# EAGLE board Spectroscilloscope Revised_5 (EAGLE 9.6.2)
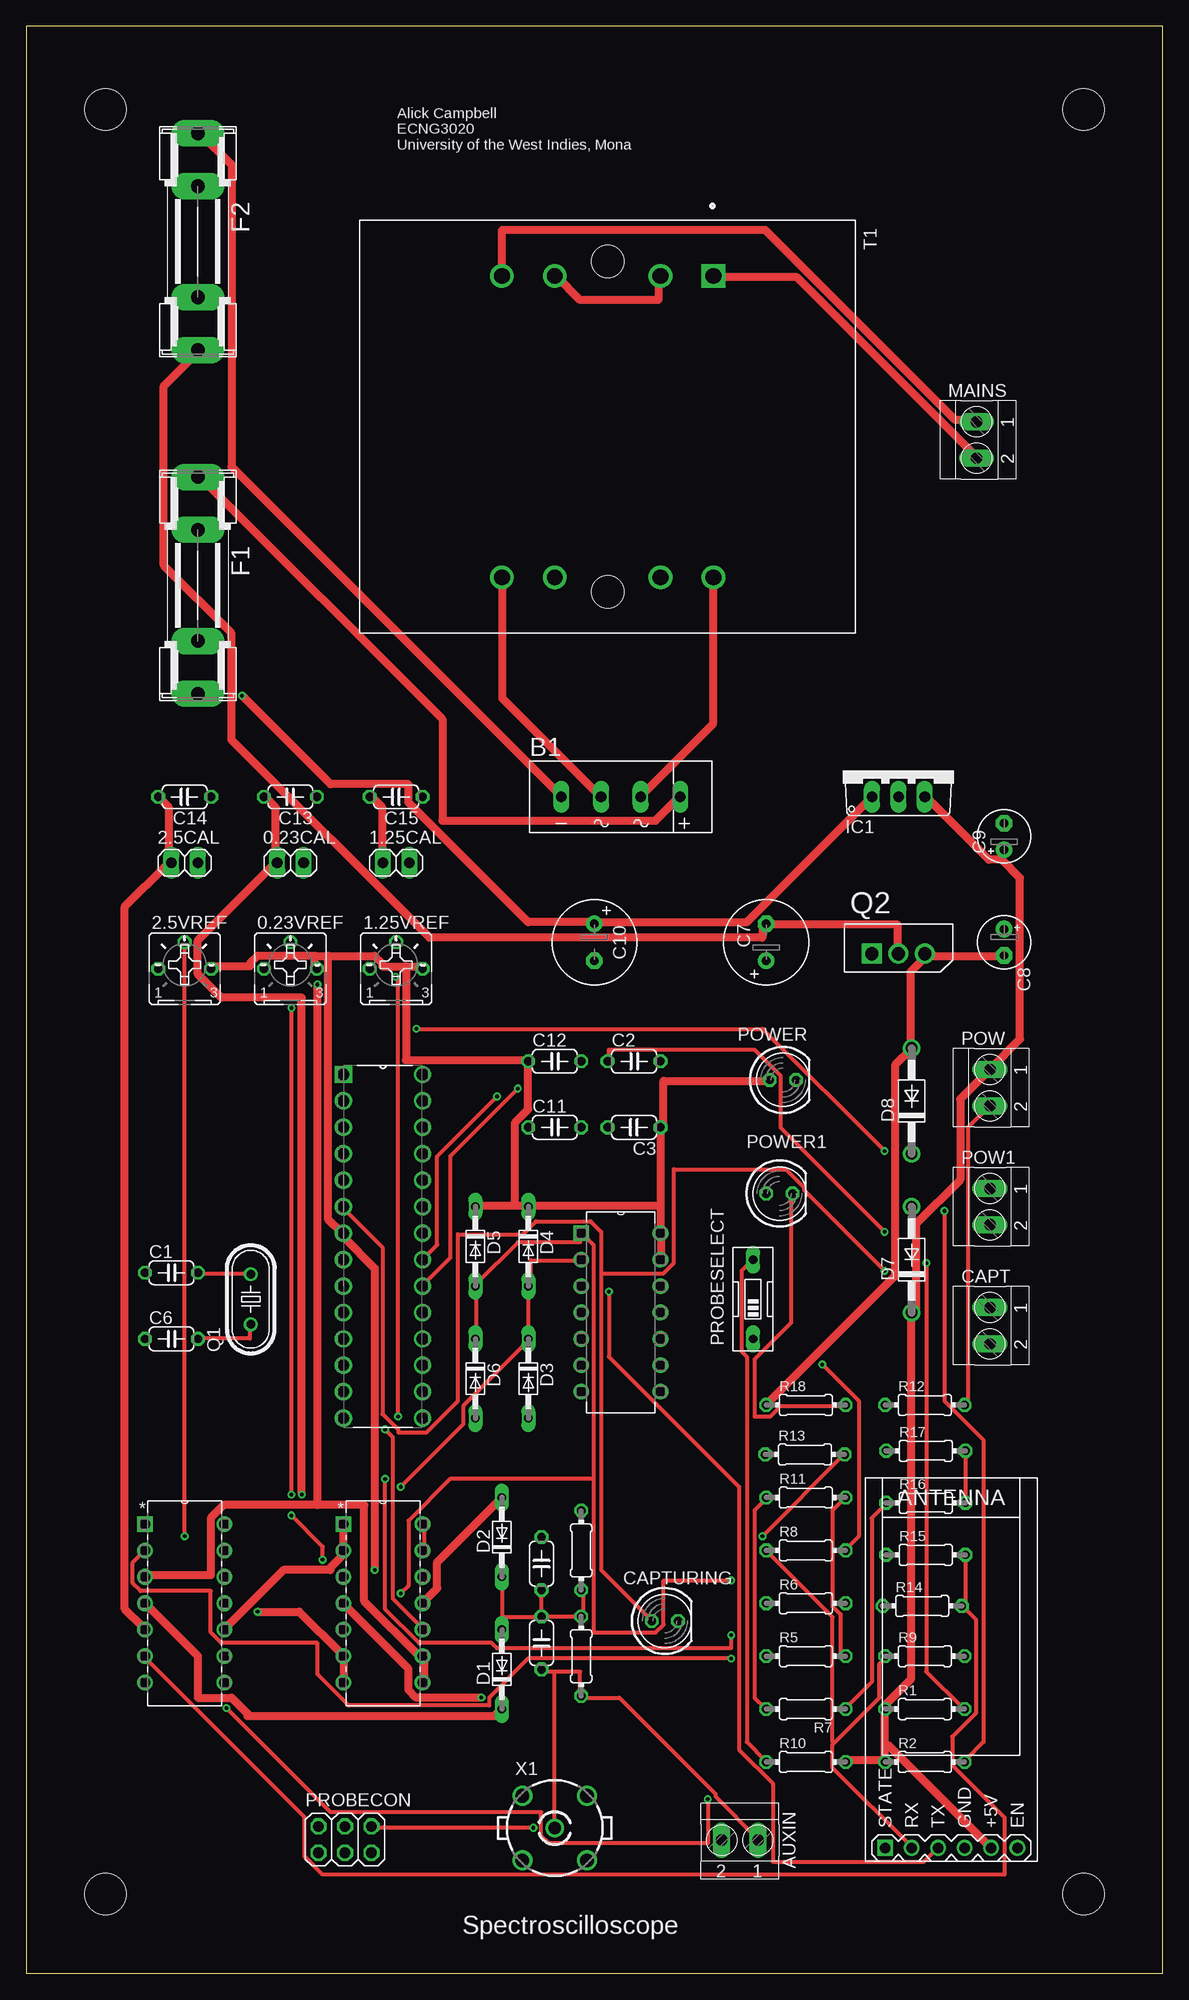
[diagram p0: board, top side]
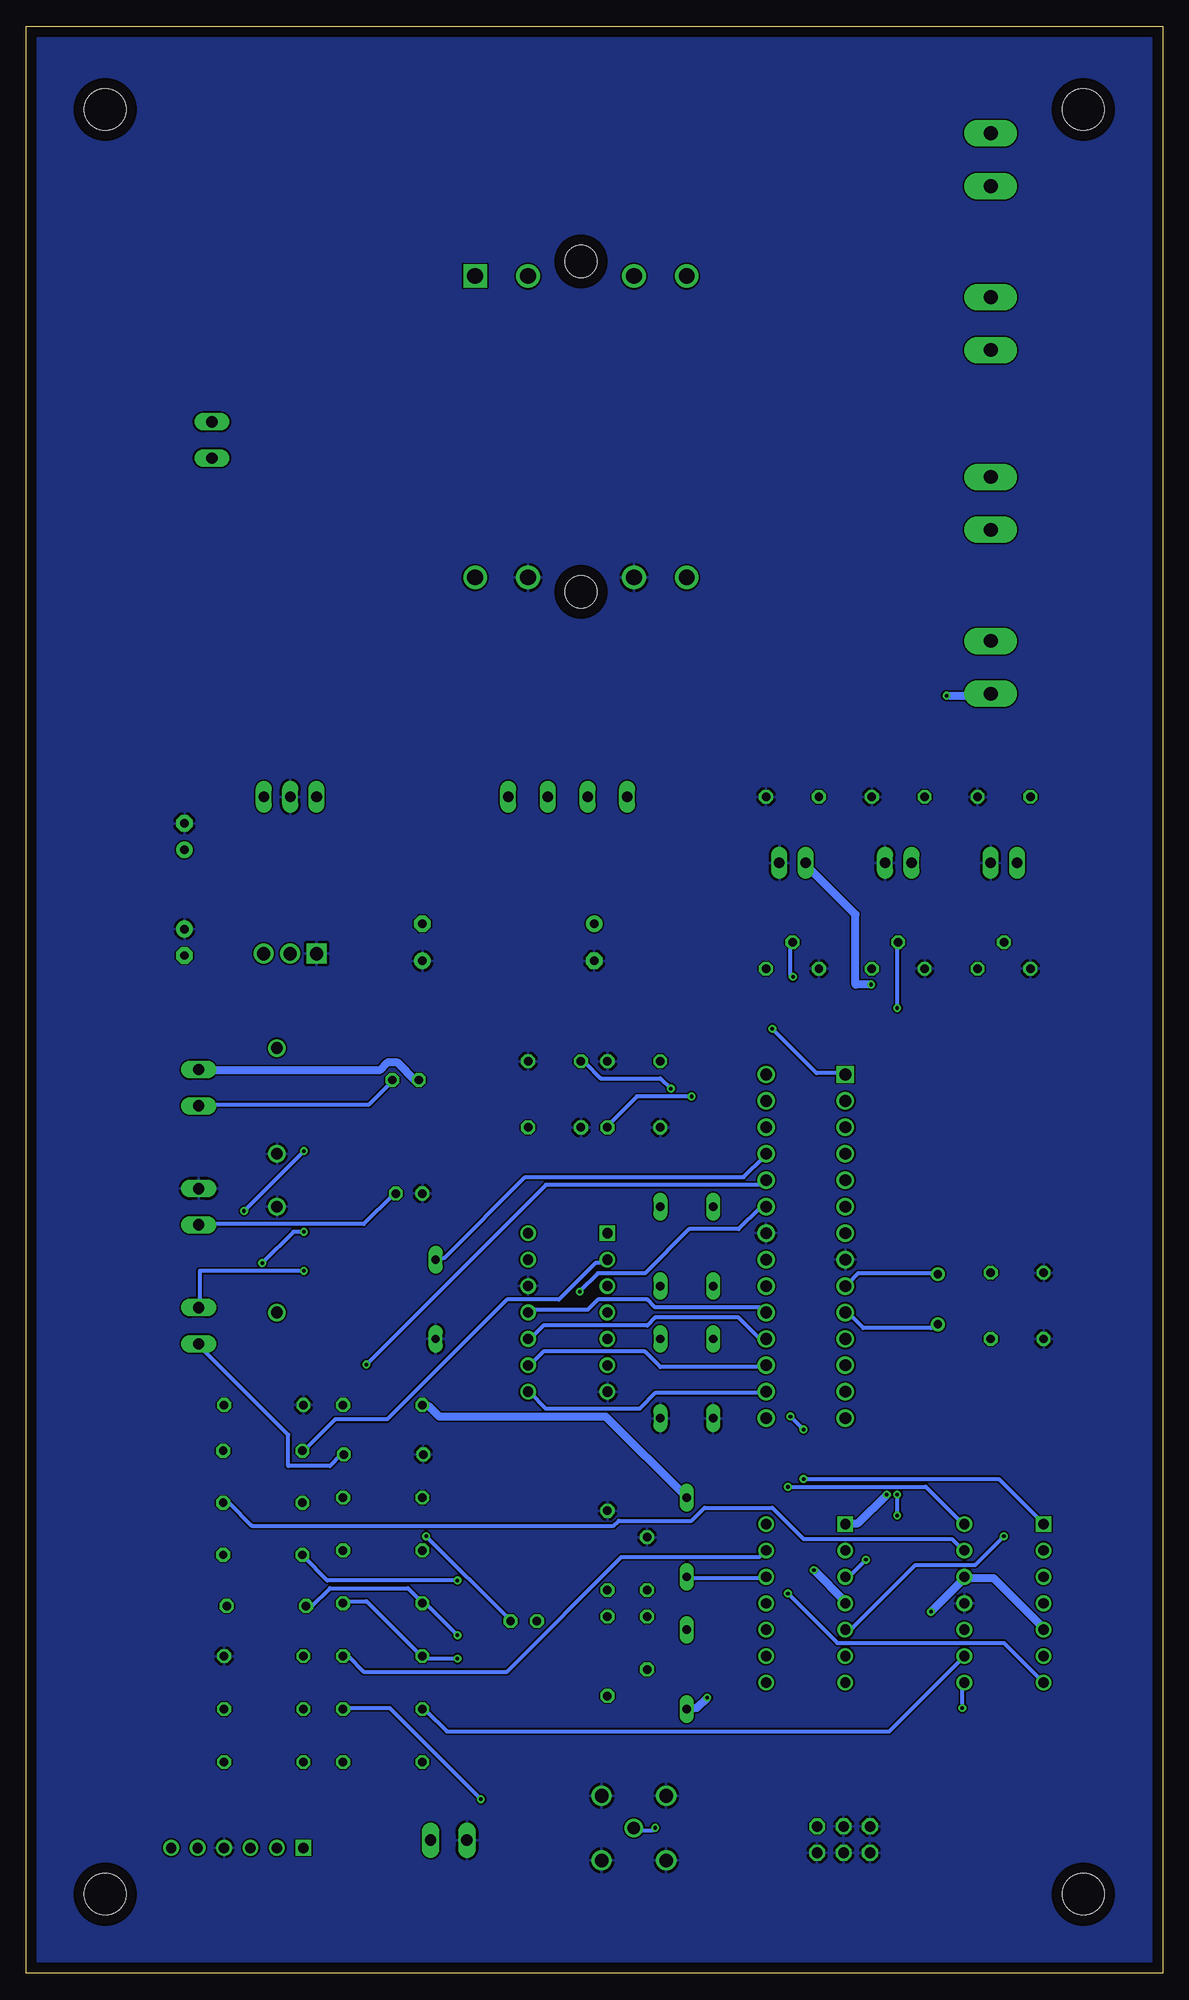
[diagram p1: board, bottom side, seen from below]

Size 109.2 x 187.08 mm. Coordinates in mm from the lower left corner, seen from the top.
Outline: 0,0 109.2,0 109.2,187.08 0,187.08 0,0
Copper layers (1*16): Top 0.035mm / dielectric 1.5mm / Bottom 0.035mm
Design rules "default": minimum track width 6mil, minimum drill 0.35mm, track to track 6mil, track to pad 6mil, pad to pad 6mil, via to via 6mil, smd to smd 6mil, copper to edge 40mil, drill to drill 6mil, minimum pad ring 10mil, minimum via ring 8mil, stop-mask expansion 4mil, vias tented up to drill 0mil, thermal gap 10mil
Net classes: 0 default: width 0.406 mm, clearance 0.102 mm; 1 Power Lines: width 0.762 mm, clearance 0.13 mm
Holes 4 mm at 7.62,7.62 101.6,7.62 101.6,179.07 7.62,179.07

## Footprints (pad centres in the part's own frame; a part is rotated, then mirrored left to right if it is on the bottom)
1X02 = drill 1.016 long: 1 -1.27,0; 2 1.27,0
B25P = drill 0.813 octagon: A -2.54,0; E 2.54,0; S 0,2.54
TERMINAL-BLOCK-2-PIN-3.5MM-LONG-PAD = drill 1.1 pad 1.7 long: 1 -1.75,-0.1; 2 1.75,-0.1
2KBP = drill 1.016 long: + 5.715,0; - -5.715,0; AC1 -1.905,0; AC2 1.905,0
C050-024X044 = drill 0.813 octagon: 1 -2.54,0; 2 2.54,0
E3,5-8 = drill 0.813 pad 1.6: + -1.778,0 | drill 0.813 pad 1.6 octagon: - 1.778,0
E2,5-5 = drill 0.813 pad 1.6: + -1.27,0 | drill 0.813 pad 1.6 octagon: - 1.27,0
LED5MM = drill 0.813 octagon: A -1.27,0; K 1.27,0
DO34-7 = drill 0.813 long: A 3.81,0; C -3.81,0
DO41-10 = drill 1.118: A 5.08,0; C -5.08,0
SHK20L = drill 1.321 pad 2.54 long: 1A -10.414,0; 1B -5.334,0; 2A 10.414,0; 2B 5.334,0
WIRELESS-BLUETOOTH-HC-05 = drill 1 square: 1 -6.35,-17.145 | drill 1: 2 -3.81,-17.145; 3 -1.27,-17.145; 4 1.27,-17.145; 5 3.81,-17.145; 6 6.35,-17.145
TO220V = drill 1.016 long: 1 -2.54,-2.54; 2 0,-2.54; 3 2.54,-2.54
2X03 = drill 1.016 octagon: 1 -2.54,-1.27; 2 -2.54,1.27; 3 0,-1.27; 4 0,1.27; 5 2.54,-1.27; 6 2.54,1.27
EDG-01 = drill 0.813 long: 1 0,-3.81; 2 0,3.81
HC49U-V = drill 0.813: 1 -2.413,0; 2 2.413,0
TO254P450X1020X1935-3P = drill 1.27 square: 1 -5.08,-1.092 | drill 1.27: 2 -2.54,-1.092; 3 0,-1.092
0204/7 = drill 0.813 octagon: 1 -3.81,0; 2 3.81,0
XFMR_VPP16-620 = drill 1.524 square: 1 -14.478,10.16 | drill 1.524: 3 -14.478,5.08; 4 -14.478,-5.08; 6 -14.478,-10.16; 7 14.478,10.16; 9 14.478,5.08; 10 14.478,-5.08; 12 14.478,-10.16 | hole 3.099: -15.875,0; 15.875,0
DIP254P762X457-28 = drill 1.118 square: 1 -7.62,33.02 | drill 1.118: 2 -7.62,30.48; 3 -7.62,27.94; 4 -7.62,25.4; 5 -7.62,22.86; 6 -7.62,20.32; 7 -7.62,17.78; 8 -7.62,15.24; 9 -7.62,12.7; 10 -7.62,10.16; 11 -7.62,7.62; 12 -7.62,5.08; 13 -7.62,2.54; 14 -7.62,0; 15 0,0; 16 0,2.54; 17 0,5.08; 18 0,7.62; 19 0,10.16; 20 0,12.7; 21 0,15.24; 22 0,17.78; 23 0,20.32; 24 0,22.86; 25 0,25.4; 26 0,27.94; 27 0,30.48; 28 0,33.02
DIP254P762X533-14 = drill 0.991 square: 1 -7.62,15.24 | drill 0.991: 2 -7.62,12.7; 3 -7.62,10.16; 4 -7.62,7.62; 5 -7.62,5.08; 6 -7.62,2.54; 7 -7.62,0; 8 0,0; 9 0,2.54; 10 0,5.08; 11 0,7.62; 12 0,10.16; 13 0,12.7; 14 0,15.24
DIP254P762X432-14 = drill 0.991 square: 1 -7.62,15.24 | drill 0.991: 2 -7.62,12.7; 3 -7.62,10.16; 4 -7.62,7.62; 5 -7.62,5.08; 6 -7.62,2.54; 7 -7.62,0; 8 0,0; 9 0,2.54; 10 0,5.08; 11 0,7.62; 12 0,10.16; 13 0,12.7; 14 0,15.24
B35N61 = drill 1.2: 1 0,0 | drill 1.3: 2 3.099,3.099; 3 -3.099,3.099; 4 -3.099,-3.099; 5 3.099,-3.099

## Placement (x,y rotation side)
0.23CAL  [1X02]  25.4,106.68 0 top
0.23VREF  100k  [B25P]  25.4,96.52 0 top
1.25CAL  [1X02]  35.56,106.68 0 top
1.25VREF  100k  [B25P]  35.56,96.52 0 top
2.5CAL  [1X02]  15.24,106.68 0 top
2.5VREF  100k  [B25P]  15.24,96.52 0 top
AUXIN  TERMINAL-BLOCK-3.5MM-2-PIN-LONG-PAD  [TERMINAL-BLOCK-2-PIN-3.5MM-LONG-PAD]  68.58,12.7 180 top
B1  [2KBP]  57.15,113.03 0 top
C1  22pF  [C050-024X044]  13.97,67.31 0 top
C2  0.1uF  [C050-024X044]  58.42,87.63 0 top
C3  0.1u  [C050-024X044]  58.42,81.28 180 top
C4  22pF  [C050-024X044]  49.53,31.75 270 top
C5  180pF  [C050-024X044]  49.53,39.37 270 top
C6  22pF  [C050-024X044]  13.97,60.96 0 top
C7  1000uF  [E3,5-8]  71.12,99.06 90 top
C8  100uF  [E2,5-5]  93.98,99.06 270 top
C9  100uF  [E2,5-5]  93.98,109.22 90 top
C10  1000uF  [E3,5-8]  54.61,99.06 270 top
C11  0.1uF  [C050-024X044]  50.8,81.28 0 top
C12  10nF  [C050-024X044]  50.8,87.63 0 top
C13  0.1u  [C050-024X044]  25.4,113.03 180 top
C14  0.1u  [C050-024X044]  15.24,113.03 180 top
C15  0.1u  [C050-024X044]  35.56,113.03 180 top
CAPT  TERMINAL-BLOCK-3.5MM-2-PIN-LONG-PAD  [TERMINAL-BLOCK-2-PIN-3.5MM-LONG-PAD]  92.71,62.23 270 top
CAPTURING  [LED5MM]  61.38,33.86 0 top
D1  BAT81  [DO34-7]  45.72,29.21 90 top
D2  BAT81  [DO34-7]  45.72,41.91 90 top
D3  BAT81  [DO34-7]  48.26,57.15 270 top
D4  BAT81  [DO34-7]  48.26,69.85 270 top
D5  BAT81  [DO34-7]  43.18,69.85 270 top
D6  BAT81  [DO34-7]  43.18,57.15 270 top
D7  1N4004  [DO41-10]  85.09,68.58 90 top
D8  1N4004  [DO41-10]  85.09,83.82 90 top
F1  [SHK20L]  16.51,133.35 270 top
F2  [SHK20L]  16.51,166.37 270 top
HC05  WIRELESS-BLUETOOTH-HC-05  [WIRELESS-BLUETOOTH-HC-05]  88.9,29.21 0 top
IC1  7805TV  [TO220V]  83.82,115.57 0 top
MAINS  TERMINAL-BLOCK-3.5MM-2-PIN-LONG-PAD  [TERMINAL-BLOCK-2-PIN-3.5MM-LONG-PAD]  91.44,147.32 270 top
POW  TERMINAL-BLOCK-3.5MM-2-PIN-LONG-PAD  [TERMINAL-BLOCK-2-PIN-3.5MM-LONG-PAD]  92.71,85.09 270 top
POW1  TERMINAL-BLOCK-3.5MM-2-PIN-LONG-PAD  [TERMINAL-BLOCK-2-PIN-3.5MM-LONG-PAD]  92.71,73.66 270 top
POWER  [LED5MM]  72.72,85.83 0 top
POWER1  [LED5MM]  72.39,74.93 0 top
PROBECON  [2X03]  30.65,12.86 0 top
PROBESELECT  [EDG-01]  69.85,64.77 0 top
Q1  16MHz  [HC49U-V]  21.59,64.77 90 top
Q2  L7905CV  [TO254P450X1020X1935-3P]  86.36,99.06 0 top
R1  10k  [0204/7]  86.36,25.4 0 top
R2  10k  [0204/7]  86.36,20.32 0 top
R3  909k  [0204/7]  53.34,30.48 270 top
R4  100k  [0204/7]  53.34,40.64 270 top
R5  1k  [0204/7]  74.93,30.48 0 top
R6  1k  [0204/7]  74.93,35.56 0 top
R7  10k  [0204/7]  74.93,25.4 180 top
R8  1k  [0204/7]  74.93,40.64 0 top
R9  2k  [0204/7]  86.36,30.48 0 top
R10  10k  [0204/7]  74.93,20.32 0 top
R11  1k  [0204/7]  74.93,45.72 0 top
R12  330  [0204/7]  86.36,54.61 0 top
R13  330  [0204/7]  74.84,49.86 0 top
R14  1k  [0204/7]  86.11,35.31 0 top
R15  1k  [0204/7]  86.45,40.21 0 top
R16  1k  [0204/7]  86.45,45.21 0 top
R17  1k  [0204/7]  86.45,50.21 0 top
R18  330  [0204/7]  74.93,54.61 0 top
T1  VPP16-620  [XFMR_VPP16-620]  55.88,148.59 270 top
U1  ATMEGA328P-PU  [DIP254P762X457-28]  38.1,53.34 0 top
U2  MCP6024-I/P  [DIP254P762X533-14]  19.05,27.94 0 top
U3  MCP6024-I/P  [DIP254P762X533-14]  38.1,27.94 0 top
U$1  MCP3004-I/P  [DIP254P762X432-14]  60.96,55.88 0 top
X1  BN35N61  [B35N61]  50.8,13.97 0 top

## Library data of the parts
0.23CAL 1.25CAL 2.5CAL PROBECON = pinhead
0.23VREF 1.25VREF 2.5VREF = pot
AUXIN CAPT MAINS POW POW1 = Rembrandt Electronics - Terminal Block 3-5mm v1-0
B1 = rectifier
C1-C15 = rcl; SPICEPREFIX: C
CAPTURING POWER POWER1 = led
D1-D8 = diode
F1 F2 = fuse; OC_FARNELL: unknown; OC_NEWARK: unknown
HC05 = diy-modules
IC1 = linear
PROBESELECT = special
Q1 = crystal; OC_FARNELL: 1666969; OC_NEWARK: unknown
Q2 = L7905CV; AVAILABILITY: In Stock; DESCRIPTION: Linear Voltage Regulator IC Negative Fixed 1 Output 1.5A TO-220; MF: STMicroelectronics; MP: L7905CV; PACKAGE: TO-220-3 ON Semiconductor; PRICE: None
R1-R18 = rcl; SPICEPREFIX: R
T1 = VPP16-620; AVAILABILITY: In Stock; DESCRIPTION: Power Transformer 4000Vrms Dual Prim. Dual Sec. 230V/115V Prim. 16V/8V Sec. Through Hole; MF: Triad Magnetics; MP: VPP16-620; PACKAGE: Triad Magnetics; PRICE: None
U1 = ATMEGA328P-PU; AVAILABILITY: Good; DESCRIPTION: AVR AVR® ATmega Microcontroller IC 8-Bit 20MHz 32KB (16K x 16) FLASH 28-PDIP; DIGIKEY-PURCHASE-URL: https://snapeda.com/shop?store=DigiKey&id=2895131; MF: Microchip; MOUSER-PURCHASE-URL: https://snapeda.com/shop?store=Mouser&id=2895131; MP: ATMEGA328P-PU; PACKAGE: DIP-28 Generic; PRICE: None
U2 U3 = MCP6024-I_P; AVAILABILITY: Warning; DESCRIPTION: IC OPAMP GP 4 CIRCUIT 14DIP; MF: Microchip Technology; MP: MCP6024-I/P; PACKAGE: None; PRICE: None; PURCHASE-URL: https://pricing.snapeda.com/search/part/MCP6024-I/P/?ref=eda
U$1 = MCP3004-I_P; AVAILABILITY: Unavailable; DESCRIPTION: 10 Bit Analog to Digital Converter 2, 4 Input 1 SAR 14-PDIP; MF: Microchip; MP: MCP3004-I/P; PACKAGE: DIP-14 Microchip; PRICE: None
X1 = con-coax; OC_FARNELL: unknown; OC_NEWARK: unknown

## Nets
0.23VREF [Power Lines]: 0.23CAL.1 C13.2 U2.10 U3.1 U3.2
1.25VREF [Power Lines]: 1.25CAL.1 C15.2 U2.3 U3.8 U3.9
1X/10X: PROBESELECT.2 R10.1 U1.25
2.5VREF [Power Lines]: 2.5CAL.1 C14.2 U2.5 U2.12 U3.6 U3.7
AC1 [Power Lines]: B1.AC1 T1.12
AC2 [Power Lines]: B1.AC2 T1.7
AC+ [Power Lines]: B1.+ F1.1A
AC- [Power Lines]: B1.- F2.1A
CAPTURING: CAPT.1 CAPTURING.A U1.6
COMPANDED: R5.2 R11.2 U3.13 U3.14
GND [Power Lines]: 0.23CAL.2 0.23VREF.A 1.25CAL.2 1.25VREF.A 2.5CAL.2 2.5VREF.A AUXIN.2 C1.1 C2.2 C3.2 C5.1 C6.1 C7.+ C8.+ C9.- C10.- C11.1 C12.2 C13.1 C14.1 C15.1 D3.A D6.A D7.A D8.C HC05.4 IC1.2 POW1.1 POWER1.A PROBECON.1 PROBECON.2 PROBECON.3 PROBECON.4 PROBECON.5 PROBESELECT.1 Q2.1 R4.1 R9.2 R12.1 R13.1 T1.9 T1.10 U1.8 U1.22 U2.11 U$1.7 U$1.12 X1.2 X1.3 X1.4 X1.5
KEY: HC05.6
MAINS1 [Power Lines]: MAINS.1 T1.6
MAINS2 [Power Lines]: MAINS.2 T1.1
MISO: U1.18 U$1.10
MOSI: U1.17 U$1.9
N$1: C1.2 Q1.2 U1.9
N$2: C6.2 Q1.1 U1.10
N$3: 2.5VREF.S U3.5
N$4: R6.1 R14.1 U2.1
N$5: R5.1 R6.2 U2.2
N$6: C11.2 U1.21
N$7: 1.25VREF.S U3.10
N$8: C2.1 R1.2 U1.20
N$9: 0.23VREF.S U3.3
N$11 [Power Lines]: T1.3 T1.4
N$12: POW.2 POWER.K R12.2
N$13: CAPT.2 CAPTURING.K R13.2
N$15: R14.2 R15.2 U2.6
N$16: R7.2 R11.1 U2.9
N$17: R8.2 U1.24
N$18: POW1.2 POWER1.K R18.2
N$21: R16.2 R17.2 U2.13
N$22: R7.1 R16.1 U2.8
NEG [Power Lines]: C7.- F2.2A Q2.2
POS [Power Lines]: C10.+ F1.2A IC1.1
PREBUFF: C4.1 C5.2 D1.A D2.C R3.1 R4.2 U3.12
RST: R2.2 U1.1
RX: HC05.2 R8.1 R9.1
SCK: U1.19 U$1.11
STATE: HC05.1
TX: HC05.3 U1.23
VCC [Power Lines]: 0.23VREF.E 1.25VREF.E 2.5VREF.E C3.1 C9.+ C12.1 D1.C D4.C D5.C D7.C HC05.5 IC1.3 POW.1 POWER.A R1.1 R2.1 R10.2 U1.7 U2.4 U3.4 U$1.13 U$1.14
VEE [Power Lines]: C8.- D2.A D8.A Q2.3 R18.1 U3.11
VIN: AUXIN.1 C4.2 PROBECON.6 R3.2 X1.1
X1: D5.A D6.C R15.1 U2.7 U$1.1
X10: D3.C D4.A R17.1 U2.14 U$1.2
~SS: U1.16 U$1.8

## Tracks (layer width: path | path; a pad name or v marks a point on that pad's centre or on a via)
0.23VREF  (via drill 0.35)
  Top 0.762: C13.2 23,113 24,112 24,106.75 0.23CAL.1 23.75,106.5 16.5,99.25 16.5,96 18.75,93.75 26.5,93.75 v26.5,46 | U2.10 19.25,33.25 24.75,38.75 29.25,38.75 29.25,39 30.25,40 30.25,40.5 U3.2 30.5,41 30.5,43 U3.1
  Bottom 0.762: v26.5,46 29.25,43.25 30.25,43.25 U3.1
1.25VREF  (via drill 0.35)
  Top 0.762: C15.2 33.25,113 34.25,112 34.25,106.75 1.25CAL.1 | 28,45 32.5,45 32.5,35.75 38,30.25 U3.9 38.25,30 38.25,28 U3.8 | 28,45 19,45 17.75,43.75 17.75,38.25 11.5,38.25 U2.3 | 28,45 v28,95
  Bottom 0.762: v28,95 29.5,95 29.5,101.75 34.25,106.5 1.25CAL.1
1X/10X
  Top 0.406: R10.1 71,20.5 69.25,22.25 69.25,59.25 68.75,59.75 68.75,67.5 69.75,68.5 PROBESELECT.2
  Bottom 0.406: U1.25 38.25,78.5 40.25,76.5 61.25,76.5 69,68.75 69.75,68.75 PROBESELECT.2
2.5VREF  (via drill 0.35)
  Top 0.762: C14.2 12.75,113 13.75,112 13.75,106.75 2.5CAL.1 13.5,106.5 9.5,102.5 9.5,35 11.25,33.25 U2.5 | U3.7 30.5,28 30.5,30.25 U3.6 30.25,30.75 26.25,34.75 v22.25,34.75
  Bottom 0.762: U2.5 11.5,33.25 16.25,38 19,38 U2.12 19.25,37.75 v22.25,34.75
AC1
  Top 0.762: B1.AC1 55,113.25 45.75,122.5 45.75,134 T1.12
AC2
  Top 0.762: B1.AC2 59.25,113.25 66,120 66,134 T1.7
AC+
  Top 0.762: B1.+ 62.75,113 60.5,110.75 40,110.75 40,120.5 16.75,143.75 F1.1A
AC-
  Top 0.762: B1.- 51.25,113.25 19.75,144.75 19.75,173.75 16.75,176.75 F2.1A
CAPTURING  (via drill 0.35)
  Top 0.406: 55.25,67.25 55.25,71.25 54.25,72.25 49,72.25 47.75,71 41.5,71 41.5,55 38.5,52 35.75,52 35.75,52.25 34.25,53.75 34.25,69.75 30.5,73.5 U1.6 | 55.25,67.25 55.25,38.75 60,34 CAPTURING.A | v82.5,67.5 74.75,75.25 74.75,75.5 73,77.25 62.25,77.25 62.25,68.25 61.25,67.25 55.25,67.25
  Bottom 0.406: v82.5,67.5 92.5,67.5 92.5,64 CAPT.1
COMPANDED
  Top 0.406: U3.13 38.25,40.75 38.25,43 U3.14 | R5.2 78.5,30.5 78.25,30.75 78.25,34.5 77.5,35.25 77.5,44.5 78.5,45.5 R11.2
  Bottom 0.406: U3.13 38.25,40.5 38.75,40 52,40 63,29 76.75,29 78.25,30.5 78.5,30.5 R5.2
GND
  pour Bottom: 0,0 0,187.07 109.22,187.07 109.22,0
MAINS1
  Top 0.762: MAINS.1 91.25,149.25 89.25,149.25 71,167.5 45.75,167.5 45.75,163.25 T1.6
MAINS2
  Top 0.762: MAINS.2 91.25,145.75 74,163 66.25,163 T1.1
MISO
  Bottom 0.406: U$1.10 60.75,61 59.5,62.25 49.5,62.25 48.75,63 40.75,63 38.75,61 38.25,61 U1.18
MOSI
  Bottom 0.406: U$1.9 60.75,58.5 59.5,59.75 49.75,59.75 48.25,58.25 38.25,58.25 U1.17
N$1
  Top 0.406: Q1.2 21.5,67.25 16.75,67.25 C1.2
  Bottom 0.406: U1.9 30.25,66.25 29.25,67.25 21.75,67.25 Q1.2
N$2
  Top 0.406: C6.2 16.75,61 21.5,61 21.5,62.25 Q1.1
  Bottom 0.406: U1.10 30.25,63.5 28.75,62 22.25,62 22,62.25 21.75,62.25 Q1.1
N$3  (via drill 0.35)
  Top 0.406: v15.25,42 15.25,99 2.5VREF.S
  Bottom 0.406: v15.25,42 18,39.25 23.75,39.25 29.75,33.25 30.25,33.25 U3.5
N$4  (via drill 0.35)
  Top 0.406: v34.5,47.5 34.5,35 37.75,31.75 44.75,31.75 45.25,31.25 67.75,31.25 v67.75,32.5
  Bottom 0.406: R14.1 82.25,35.25 81.75,35.25 80,37 72.5,37 71.25,35.75 R6.1 71,35.5 70.75,35.5 v67.75,32.5 | U2.1 15.75,47.5 v34.5,47.5
N$5  (via drill 0.35)
  Top 0.406: v67.75,30.25 48.25,30.25 44.5,26.5 44.5,25.75 31,25.75 28,28.75 28,31.75 18.75,31.75 17.75,32.75 17.75,36.75 11,36.75 10.25,37.5 10.25,39.5 11.25,40.5 U2.2
  Bottom 0.406: R6.2 78.5,35.75 76.5,35.75 71.25,30.5 R5.1 71,30.25 v67.75,30.25
N$6  (via drill 0.35)
  Top 0.406: v45.25,84.25 39.5,78.5 39.5,70 38.25,68.75 U1.21
  Bottom 0.406: v45.25,84.25 50.5,84.25 53.25,81.5 C11.2
N$7  (via drill 0.35)
  Top 0.406: v35.5,95.75 35.75,95.5 v35.75,53.5 | v34.5,52.25 35.25,51.5 35.25,36 38,33.25 U3.10
  Bottom 0.406: v35.5,95.75 35.75,95.75 35.75,99 1.25VREF.S | v34.5,52.25 v35.75,53.5
N$8  (via drill 0.35)
  Top 0.406: v86.5,68.25 86.5,29 90,25.5 R1.2 | v82.5,71.25 72.5,81.25 72.5,86.25 70,88.75 56,88.75 56,87.75 C2.1 | v47.25,85 40.75,78.5 40.75,68.75 38.25,66.25 U1.20
  Bottom 0.406: v86.5,68.25 83.5,71.25 v82.5,71.25 | v47.25,85 48.25,86 54,86 55.5,87.5 55.75,87.5 C2.1
N$9  (via drill 0.35)
  Top 0.406: v25.5,46 v25.5,92.75 | v25.5,44 28.5,41 v28.5,39.75
  Bottom 0.406: v25.5,92.75 25.5,99 0.23VREF.S | v25.5,44 v25.5,46 | v28.5,39.75 30,38.25 30.25,38.25 U3.3
N$11
  Top 0.762: T1.4 51,163 53.25,160.75 60.75,160.75 60.75,163 T1.3
N$12
  Top 0.406: R12.2 90.25,54.75 90.5,55 90.5,81.25 92.5,83.25 POW.2
  Bottom 0.406: POWER.K 74,85.75 76.25,83.5 92.5,83.5 POW.2
N$13  (via drill 0.35)
  Top 0.406: v70.75,42 78.5,49.75 R13.2
  Bottom 0.406: v70.75,42 62.75,34 CAPTURING.K | CAPT.2 92.5,60.25 84,51.75 84,48.75 80,48.75 79,49.75 78.75,49.75 R13.2
N$15
  Top 0.406: R15.2 90.25,40 90.25,35.75 90,35.5 R14.2 90,35.25 91.25,34 91.25,25 89,22.75 89,20 94,15 94,9.5 28.5,9.5 26.75,11.25 26.75,15 11.5,30.25 U2.6
N$16
  Top 0.406: R7.2 71,25.5 70,26.5 70,44.5 71,45.5 R11.1
  Bottom 0.406: U2.9 19.25,30.25 26.25,23.25 68.75,23.25 70.75,25.25 71,25.25 R7.2
N$17  (via drill 0.35)
  Top 0.406: v76.5,58.5 80,55 80,42 78.75,40.75 R8.2
  Bottom 0.406: v76.5,58.5 59.25,75.75 38.5,75.75 38.25,76 U1.24
N$18
  Top 0.406: R18.2 78.5,54.5 72.25,54.5 72.25,54.25 71.5,53.5 70,53.5 70,59 73.5,62.5 73.5,74.75 POWER1.K
  Bottom 0.406: POW1.2 92.5,72 76.75,72 74,74.75 73.75,74.75 POWER1.K
N$21
  Top 0.406: R16.2 90.25,45.25 90.25,50 R17.2
  Bottom 0.406: U2.13 19.25,40.75 20.25,41.75 34.5,41.75 37.5,44.75 44,44.75 45.25,43.5 52.25,43.5 52.75,43 87.5,43 89.75,45.25 90.25,45.25 R16.2
N$22  (via drill 0.35)
  Top 0.406: R7.1 78.75,25.5 81.25,28 81.25,43.75 82.5,45 R16.1 | v19.25,25.5 29.25,15.5 49.5,15.5 49.5,13.25 50.25,12.5 65.5,12.5 v65.5,16.75
  Bottom 0.406: v19.25,25.5 19.25,27.75 U2.8 | v65.5,16.75 74.25,25.5 78.5,25.5 R7.1
NEG
  Top 0.762: Q2.2 83.75,98 83.75,100.75 71.25,100.75 C7.- 70.75,100.75 70.75,99.5 38.75,99.5 19.75,118.5 19.75,128.75 13.25,135.25 13.25,152.5 16.5,155.75 F2.2A
POS  (via drill 0.35)
  Top 0.762: IC1.1 69.25,101 54.75,101 C10.+ 54.25,101 48.25,101 36.75,112.5 36.75,114.25 29.25,114.25 v20.75,122.75
  Bottom 0.762: v20.75,122.75 16.75,122.75 F1.2A
PREBUFF
  Top 0.406: C4.1 49.5,34.5 49.5,36.75 C5.2 | R4.2 53.5,36.75 53.5,34.5 R3.1 53.25,34.25 49.75,34.25 C4.1 | 45.75,34.25 45.75,38 D2.C | 45.75,34.25 45.75,33.25 D1.A 45.75,34.25 | 45.75,34.25 49.5,34.25 C4.1
  Bottom 0.406: U3.12 38.25,38 45.5,38 D2.C
RST  (via drill 0.35)
  Top 0.406: v88.25,73.25 88.25,55 92,51.25 92,22.25 90.25,20.5 R2.2 | v82.5,79 70.75,90.75 v37.5,90.75
  Bottom 0.406: v82.5,79 v88.25,73.25 | v37.5,90.75 33.25,86.5 30.5,86.5 U1.1
RX
  Top 0.406: 77.62,22.12 77.5,22 77.5,19.75 85,12.25 HC05.2 | 77.62,22.12 82,26.5 82,29.75 82.5,30.25 R9.1 | R8.1 71.25,40.5 77.5,34.25 77.5,22.25 77.62,22.12
SCK
  Bottom 0.406: U$1.11 60.75,63.5 60.5,63.75 55.25,63.75 54.25,64.75 49.5,64.75 48.75,64 38.75,64 38.25,63.5 U1.19
TX  (via drill 0.35)
  Top 0.406: v56,65.5 56,59.25 68.5,46.75 68.5,21.5 71.75,18.25 71.75,10.75 86.25,10.75 87.5,12 HC05.3
  Bottom 0.406: v56,65.5 54.25,67.25 49.75,67.25 45.5,71.5 40.75,71.5 38.75,73.5 38.25,73.5 U1.23
VCC  (via drill 0.35)
  Top 0.762: R10.2 78.75,20.5 82.5,20.5 R2.1 82.5,20.75 82.5,22 | 82.5,22 82.5,25.25 R1.1 82.5,25.75 85,28.25 85,63.25 D7.C 85.25,63.5 85.5,63.75 85.5,72 89.75,76.25 89.75,84 92.5,86.75 POW.1 92.75,87 95.5,89.75 95.5,105.25 93.75,107 | HC05.5 92.5,12.25 82.75,22 82.5,22 | 93.75,107 92.5,107 86.5,113 IC1.3 | 93.75,107 93.75,107.75 C9.+ | 47,73.75 48.25,73.75 D4.C 48.5,73.75 61,73.75 | 47,73.75 43.25,73.75 D5.C | 47,73.75 47,81.75 48.25,83 48.25,87.5 C12.1 48,87.75 36.5,87.75 36.5,96.75 | 61,73.75 61,71.25 U$1.14 61,70.75 61,68.75 U$1.13 | 61,73.75 61,81.25 C3.1 61.25,81.5 61.25,85.75 71.25,85.75 POWER.A | D1.C 45.5,25.25 45,24.75 21.25,24.75 21.25,25 19.75,26.5 16.5,26.5 16.5,30.5 11.5,35.5 U2.4 | v43.75,26.5 37.5,26.5 36.75,27.25 36.75,29.25 30.5,35.5 U3.4 | 27.75,97.75 22.25,97.75 21.5,97 21.5,96.75 18,96.75 2.5VREF.E | 27.75,97.75 27.75,96.75 0.23VREF.E | 36.5,96.75 34.25,96.75 34.25,97 33.5,97.75 29,97.75 | 36.5,96.75 38,96.75 1.25VREF.E | 27.75,97.75 29,97.75 | 29,97.75 29,72.5 30.25,71.25 U1.7 30.5,70.75 33.5,67.75 v33.5,38.75
  Bottom 0.762: v43.75,26.5 44.75,25.5 45.5,25.5 D1.C | v33.5,38.75 30.5,35.75 U3.4 | POW.1 92.5,86.75 75.25,86.75 74.5,87.5 73.5,87.5 71.75,85.75 71.5,85.75 POWER.A
VEE
  Top 0.762: D2.A 39.5,39.5 39.5,37 38.25,35.75 U3.11 | C8.- 93.75,97.75 86.5,97.75 Q2.3 86.25,97.5 85,96.25 85,89.25 D8.A 85,88.75 83.5,87.25 83.5,67 71.25,54.75 R18.1
  Bottom 0.762: D2.A 53.5,53.5 69.5,53.5 70.5,54.5 71,54.5 R18.1
VIN  (via drill 0.35)
  Top 0.406: v48.75,14 33.25,14 PROBECON.6 | 50.75,29 53.25,29 53.25,26.75 R3.2 53.5,26.5 57,26.5 66.25,17.25 66.25,17 70.25,13 AUXIN.1 | 50.75,29 49.75,29 C4.2 | 50.75,29 50.75,14 X1.1
  Bottom 0.406: v48.75,14 49,13.75 50.75,13.75 X1.1
X1  (via drill 0.35)
  Top 0.406: D6.C 43.25,61 43.25,66 D5.A 43.25,66.25 47.25,70.25 53.25,70.25 53.25,71 U$1.1 53.5,71 54.5,70 54.5,47.5 | v67.75,37.75 61.25,37.75 61.25,33.5 60.5,32.75 54.5,32.75 54.5,47.5 | v36,36.5 36.75,37.25 36.75,43.5 40.75,47.5 54.5,47.5
  Bottom 0.406: v67.75,37.75 80.25,37.75 82.5,40 R15.1 | v36,36.5 31.25,31.75 15.25,31.75 11.5,28 U2.7
X10  (via drill 0.35)
  Top 0.406: v36,46.75 42,52.75 42,54.5 48.25,60.75 D3.C 48.25,61 48.25,66 D4.A 48.5,66.25 48.5,68.5 53.25,68.5 U$1.2
  Bottom 0.406: R17.1 82.5,50.25 79.5,53.25 74.5,53.25 63,64.75 58,64.75 54.5,68.25 53.75,68.25 53.5,68.5 U$1.2 | v36,46.75 22.75,46.75 19.25,43.25 U2.14
~SS
  Bottom 0.406: U$1.8 60.75,55.75 59.25,54.25 50.25,54.25 48.75,55.75 38.25,55.75 U1.16

## Text on the board
tPlace: Alick Campbell / ECNG3020 / University of the West Indies, Mona | Spectroscilloscope